# Altium PCB PCB1.PcbDoc
Units mm, origin at the board's own origin, x right, y up, seen from the top; angles counter-clockwise.
Board outline 99.95 x 100 mm, 2 copper layers (Top Layer, Bottom Layer); 21 components, 12 nets, 74 pads, 4 vias.
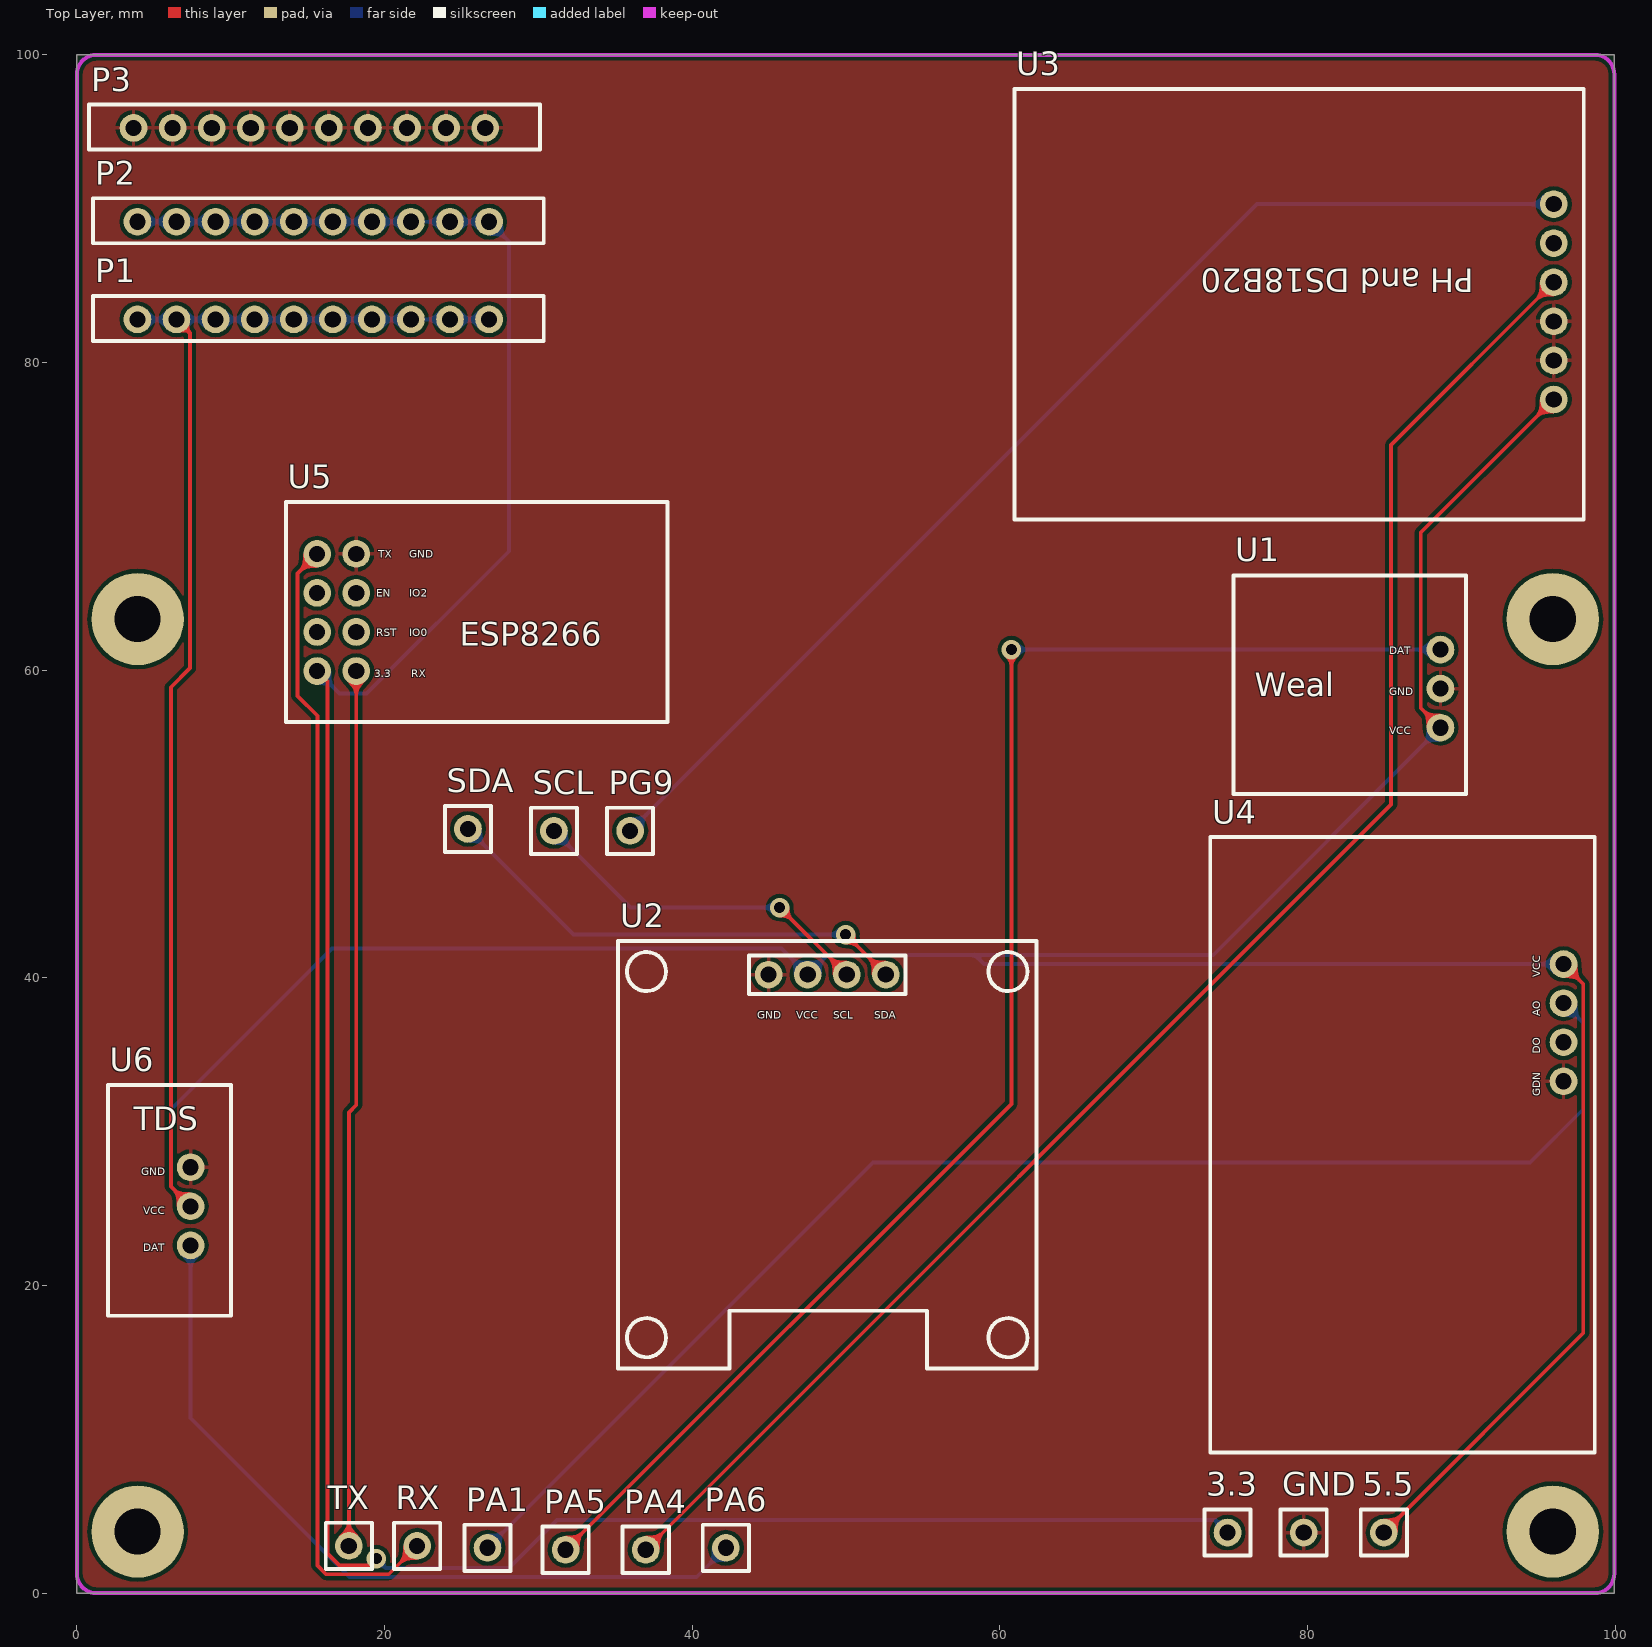
[diagram p0: Top Layer view]
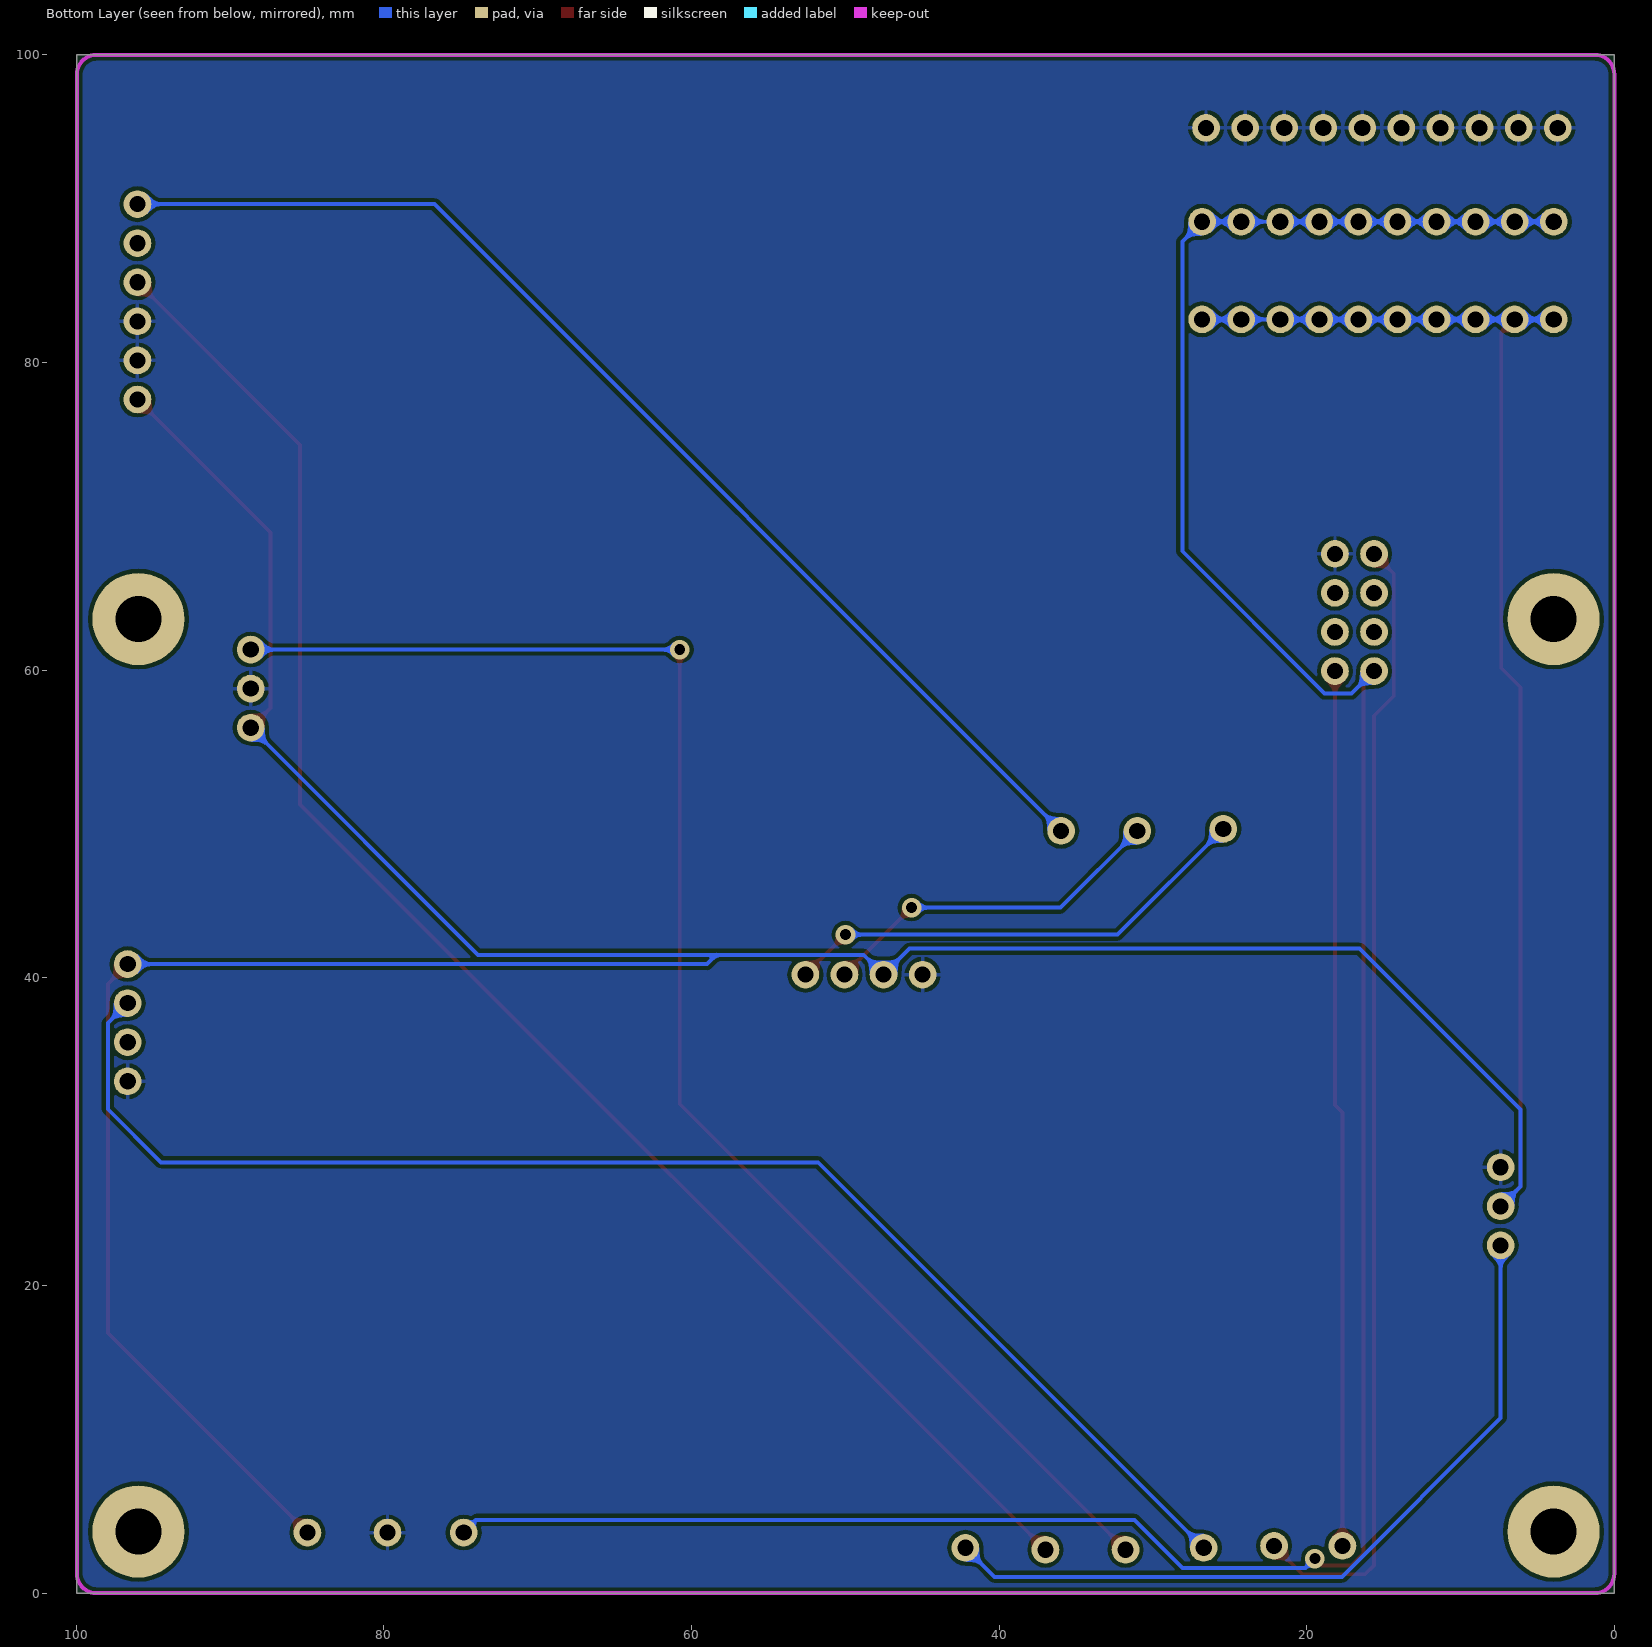
[diagram p1: Bottom Layer view, seen from below]

## Layer stack, top to bottom
Top Solder: solder mask 0.0102, Solder Resist, Dk 3.5
Top Layer: signal copper 0.0356
Dielectric 1: dielectric 0.32, FR-4, Dk 4.8
Bottom Layer: signal copper 0.0356
Bottom Solder: solder mask 0.0102, Solder Resist, Dk 3.5

## Board outline
0,0 0,100 99.949,100 99.949,0

## Design rules (kind name [scope] priority, off if disabled: settings)
Clearance [All] p1: gap=0.254
PolygonConnect [All] p1: connectstyle=Relief reliefconductorwidth=0.254 reliefentries=4 polygonreliefangle="90 Angle" airgapwidth=0.254
RoutingVias [All] p1: holewidth=0.711 width=1.27 viastyle="Through Hole" minholewidth=0.711 minwidth=1.27 maxholewidth=0.711 maxwidth=1.27
SolderMaskExpansion [All] p1: expansion=0.102
Width [All] p1: maxlimit=0.254 minlimit=0.254 preferedwidth=0.254
30 further rules are at their usual default settings.

## Components (designator, comment, footprint, x,y, rotation, side; value= is the part's Value field where it differs from the comment)
3.3 "P1" PAI_1 76.303,5.437 r0 top
5.5 "P1" PAI_1 86.463,5.437 r0 top
GND "P1" PAI_1 81.256,5.437 r0 top
P1 "Pai_Zhen" PAI_ZHEN 3.937,82.804 r90 top
P2 "Pai_Zhen" PAI_ZHEN 3.937,89.154 r90 top
P3 "Pai_Zhen" PAI_ZHEN 3.683,95.25 r90 top
PA1 "P1" PAI_1 28.194,4.445 r0 top
PA4 "P1" PAI_1 38.481,4.318 r0 top
PA5 "P1" PAI_1 33.274,4.318 r0 top
PA6 "P1" PAI_1 43.688,4.445 r0 top
PG9 "P1" PAI_1 37.465,51.054 r0 top
RX "P1" PAI_1 23.622,4.572 r0 top
SCL "P1" PAI_1 32.512,51.054 r0 top
SDA "P1" PAI_1 26.924,51.181 r0 top
TX "P1" PAI_1 19.177,4.572 r0 top
U1 "Weal" Weal 75.184,51.943 r0 top
U2 "SSD1315" ssd1315 35.306,16.51 r0 top
U3 "DS18B20andPh" DS18B20 60.96,97.79 r180 top
U4 "ZhuoDu" ZhuoDu 98.679,9.144 r90 top
U5 "ESP8266" ESP8266 13.589,56.642 r0 top
U6 "TDS" TDS 2.032,18.034 r0 top

## Footprints (in the part's own frame and the unit in brackets; to place one, negate y for a bottom-side part, rotate by r counter-clockwise, add the part's x,y. Pads: shape width x height; smd on the part's side, far side on the other; paste and mask are expansions set on the pad)
DS18B20 [mm]
  round 1.8 hole 1.05: 2V5(-35.052,10.033) GND(-35.052,15.113) GND(-35.052,17.653) PO(-35.052,12.573) T1(-35.052,7.493) VCC(-35.052,20.193)
  silkscreen extent -37,0 0,28
ESP8266 [mm]
  round 1.8 hole 1.05: 3.3(2.032,3.302) EN(2.032,8.382) GND(4.572,10.922) IO0(4.572,5.842) IO2(4.572,8.382) RST(2.032,5.842) RX(4.572,3.302) TX(2.032,10.922)
  silkscreen extent 0,0 24.8,14.3
PAI_1 [mm]
  round 1.8 hole 1.05: 0(-1.5,-1.5)
  silkscreen extent -3,-3 0,0
PAI_ZHEN [mm]
  round 1.8 hole 1.05: 0(0,0) 0(0,-2.54) 0(0,-5.08) 0(0,-7.62) 0(0,-10.16) 0(0,-12.7) 0(0,-15.24) 0(0,-17.78) 0(0,-20.32) 0(0,-22.86)
  silkscreen extent -1.4,-26.42 1.52,2.89
ssd1315 [mm]
  round 1.8 hole 1.05 paste+0 mask+0.05: GND(9.663,23.695) SCL(14.743,23.695) SDA(17.283,23.695) VCC(12.203,23.695)
  silkscreen extent -0.13,-1.91 27.07,25.89
TDS [mm]
  round 1.8 hole 1.05: DAT(5.361,4.57) GND(5.361,9.65) VCC(5.361,7.11)
  silkscreen extent 0,0 8,15
Weal [mm]
  round 1.8 hole 1.05: DAT(13.462,9.398) GND(13.462,6.858) VCC(13.462,4.318)
  silkscreen extent 0,-0.01 15.11,14.23
ZhuoDu [mm]
  round 1.8 hole 1.05: AO(29.21,2.032) DO(26.67,2.032) GND(24.13,2.032) VCC(31.75,2.032)
  silkscreen extent 0,0 40,25

## Free pads (board coordinates)
  round 6 hole 3: 0(3.949,4) 0(3.949,63.326) 0(95.949,4) 0(95.949,63.326)

## Via types
v1: diameter 1.27, hole 0.711, Top Layer to Bottom Layer, 4 vias

## Nets (pads, with @x,y where several pads share a name; then routed paths per layer and width w, separated by ;. In a path a pad name is that pad's centre, name@x,y a point inside that pad or via, vN(x,y) a via of type N, cw(c..) or ccw(c..) an arc to the next point about the centre after c; other vN are vias at no path point)
3.3: 3.3.0 P2.0 U5.3.3 | length 180.3
  Top Layer w0.254: U5.3.3 16.295,59.27 16.295,2.579 17.082,1.791 19.012,1.791 v1(19.47,2.248)
  Bottom Layer w0.254: P2.0@3.937,89.154 6.477,89.154 9.017,89.154 11.557,89.154 14.097,89.154 16.637,89.154 19.177,89.154 21.717,89.154 24.257,89.154 26.797,89.154 28.08,87.871 28.08,67.73 18.835,58.484 17.081,58.484 U5.3.3 ; v1(19.47,2.248) 20.079,1.639 28.08,1.639 31.204,4.763 73.977,4.763 3.3.0
5.5: 5.5.0 P1.0 U1.VCC U2.VCC U3.VCC U4.VCC U6.VCC | length 289.8
  Top Layer w0.254: P1.0@6.477,82.804 7.354,81.927 7.354,60.135 6.109,58.89 6.109,26.428 U6.VCC ; 5.5.0 97.93,16.904 97.93,39.611 U4.VCC ; U1.VCC 87.364,57.543 87.364,68.949 U3.VCC
  Bottom Layer w0.254: P1.0@3.937,82.804 6.477,82.804 9.017,82.804 11.557,82.804 14.097,82.804 16.637,82.804 19.177,82.804 21.717,82.804 24.257,82.804 P1.0@26.797,82.804 ; U6.VCC 6.109,26.428 6.109,31.433 16.574,41.898 45.816,41.898 U2.VCC 48.795,41.491 58.382,41.491 ; U1.VCC 73.876,41.491 58.382,41.491 ; U4.VCC 58.98,40.894 58.382,41.491
ADC1: PA1.0 U4.AO | length 90.5
  Bottom Layer w0.254: PA1.0 51.753,28.004 94.476,28.004 97.93,31.458 97.93,37.071 U4.AO
ADC2: PA5.0 U1.DAT | length 98.4
  Top Layer w0.254: PA5.0 60.757,31.801 v1(60.757,61.341)
  Bottom Layer w0.254: v1(60.757,61.341) U1.DAT
ADC3: PA4.0 U3.PO | length 106.9
  Top Layer w0.254: PA4.0 85.433,51.27 85.433,74.638 U3.PO
ADC4: PA6.0 U6.DAT | length 51.1
  Bottom Layer w0.254: U6.DAT 7.393,11.379 17.717,1.055 40.298,1.055 PA6.0
GND: GND.0 P3.0 U1.GND U2.GND U3.GND U4.GND U5.GND U6.GND
PG9: PG9.0 U3.T1 | length 76.9
  Bottom Layer w0.254: PG9.0 76.708,90.297 U3.T1
RX: RX.0 U5.TX | length 74.3
  Top Layer w0.254: U5.TX 14.339,66.282 14.339,58.332 15.634,57.036 15.634,1.791 16.199,1.226 20.276,1.226 RX.0
SCL: SCL.0 U2.SCL | length 22.9
  Top Layer w0.254: v1(45.689,44.565) U2.SCL
  Bottom Layer w0.254: SCL.0 36.001,44.565 v1(45.689,44.565)
SDA: SDA.0 U2.SDA | length 31.1
  Top Layer w0.254: v1(49.982,42.812) U2.SDA
  Bottom Layer w0.254: SDA.0 32.293,42.812 v1(49.982,42.812)
TX: TX.0 U5.RX | length 57.1
  Top Layer w0.254: TX.0 17.677,31.255 18.161,31.739 U5.RX
pads on no net: U3.2V5 U4.DO U5.EN U5.IO0 U5.IO2 U5.RST

## Polygon pours and split planes (outlines as drawn)
GND on Top Layer "Top Layer-No Net" (solid, remove dead copper, pour order 0): -10.795,109.474 -11.938,108.331 -11.938,-10.668 106.172,-10.668 110.49,-6.35 109.22,-5.08 109.22,112.395
GND on Bottom Layer "Top Layer-No Net" (solid, remove dead copper, pour order 2): -12.954,109.347 -12.954,-9.271 -11.176,-11.049 -5.08,-4.953 114.808,-4.953 114.808,103.886 107.188,111.506

## Keep-outs
Keep-Out Layer:
  lines w0.254: 98.679,0 ccw(c98.679,1.27) 99.949,1.27 99.949,98.73 ccw(c98.679,98.73) 98.679,100 ; 98.73,0 1.27,0 cw(c1.27,1.27) 0,1.27 0,98.73 cw(c1.27,98.73) 1.27,100 98.73,100

## Silkscreen, mask and mechanical layers (free items; w line width, h text height)
Mechanical 1:
  lines w0.254: 0,1.27 ccw(c1.27,1.27) 1.27,0 98.679,0 ccw(c98.679,1.27) 99.949,1.27 99.949,98.73 ccw(c98.679,98.73) 98.679,100 1.27,100 ccw(c1.27,98.73) 0,98.73 0,1.27

## Text inside footprints (layer, text, board x,y; h text height)
U1: Top Overlay "GND" at 85.312,58.382 h0.5; Top Overlay "VCC" at 85.312,55.842 h0.5; Top Overlay "DAT" at 85.312,61.049 h0.5
U2: Top Overlay "GND" at 44.223,37.325 h0.5; Top Overlay "VCC" at 46.763,37.325 h0.5; Top Overlay "SCL" at 49.176,37.325 h0.5; Top Overlay "SDA" at 51.843,37.325 h0.5
U3: Top Overlay "PH and DS18B20" at 90.805,86.106 h1.52 r180
U4: Top Overlay "GDN" at 95.136,32.285 h0.5 r90; Top Overlay "DO" at 95.136,35.079 h0.5 r90; Top Overlay "AO" at 95.136,37.492 h0.5 r90; Top Overlay "VCC" at 95.136,40.032 h0.5 r90
U5: Top Overlay "TX" at 19.585,67.297 h0.5; Top Overlay "GND" at 21.617,67.297 h0.5; Top Overlay "EN" at 19.458,64.757 h0.5; Top Overlay "IO2" at 21.617,64.757 h0.5; Top Overlay "RST" at 19.458,62.217 h0.5; Top Overlay "IO0" at 21.617,62.217 h0.5; Top Overlay "3.3" at 19.331,59.55 h0.5; Top Overlay "RX" at 21.744,59.55 h0.5
U6: Top Overlay "GND" at 4.191,27.178 h0.5; Top Overlay "VCC" at 4.318,24.638 h0.5; Top Overlay "DAT" at 4.318,22.225 h0.5